# Altium PCB display.PcbDoc
Units mm, origin at the board's own origin, x right, y up, seen from the top; angles counter-clockwise.
Board outline 76 x 33 mm, 2 copper layers (Top Layer, Bottom Layer), stack 1.57 mm thick; 35 components, 31 nets, 127 pads, 53 vias.
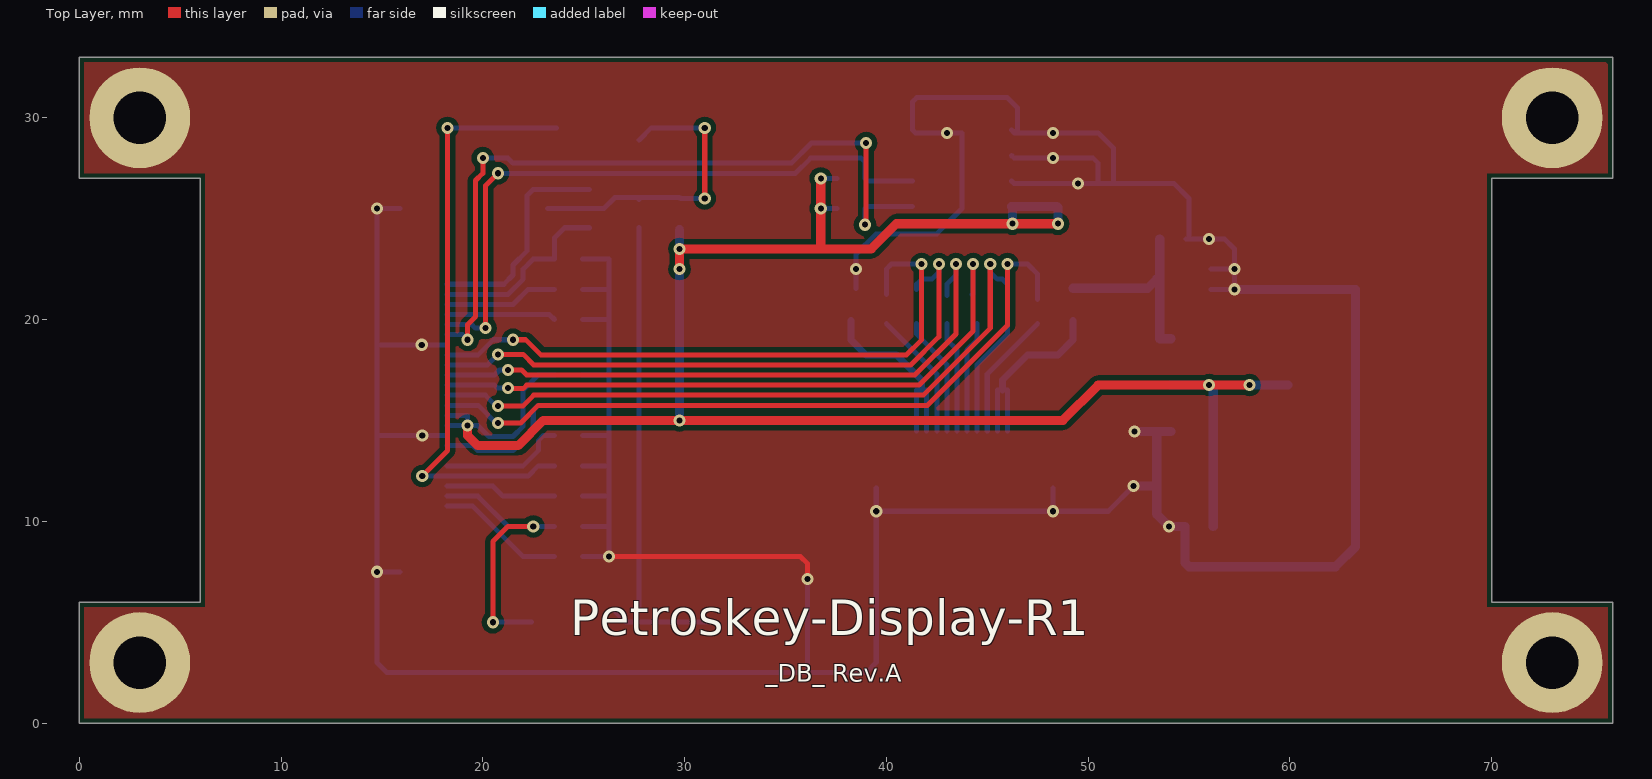
[diagram p0: Top Layer view]
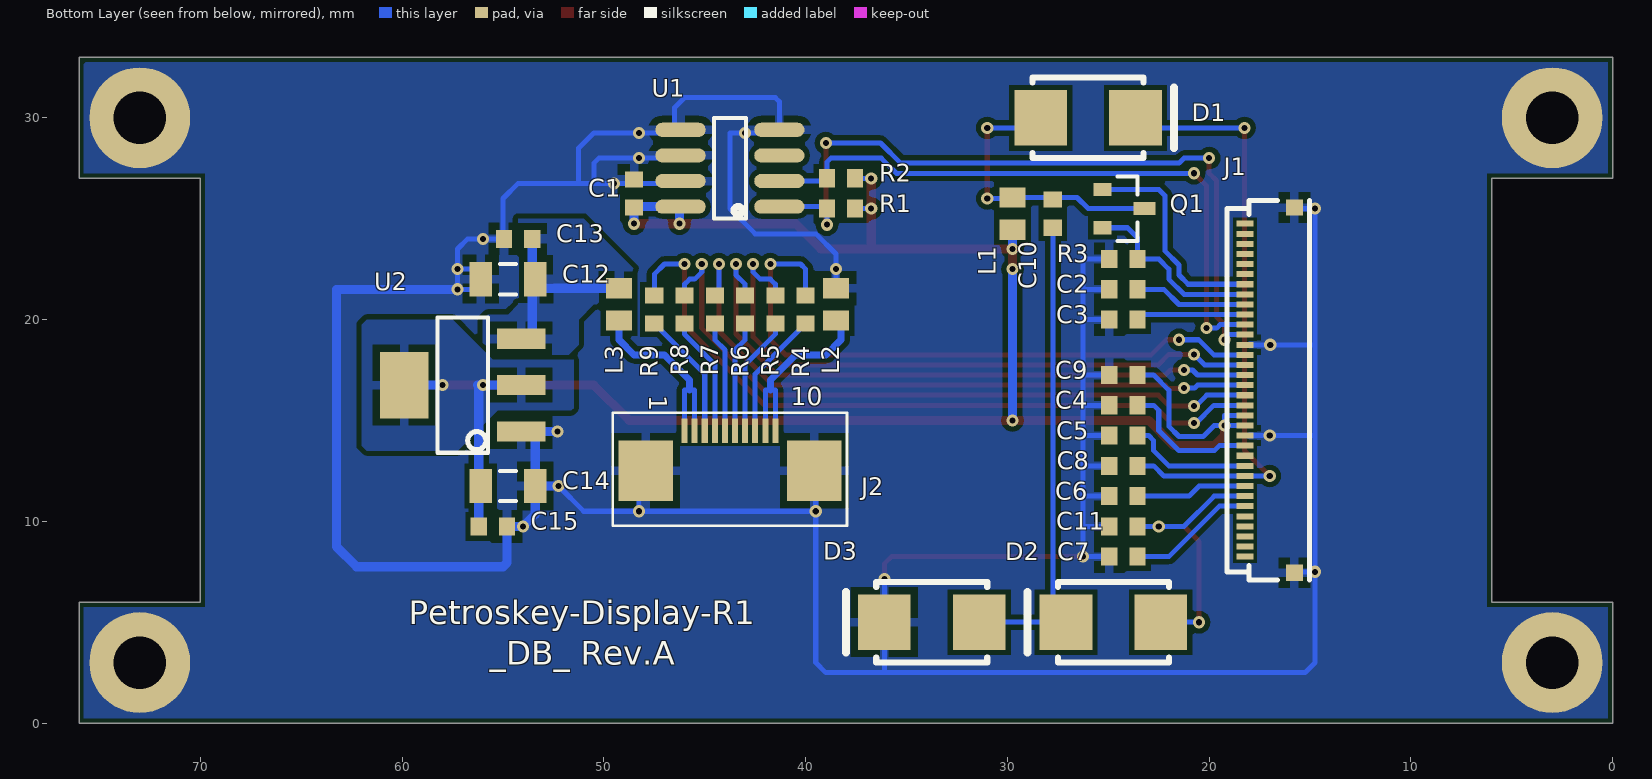
[diagram p1: Bottom Layer view, seen from below]
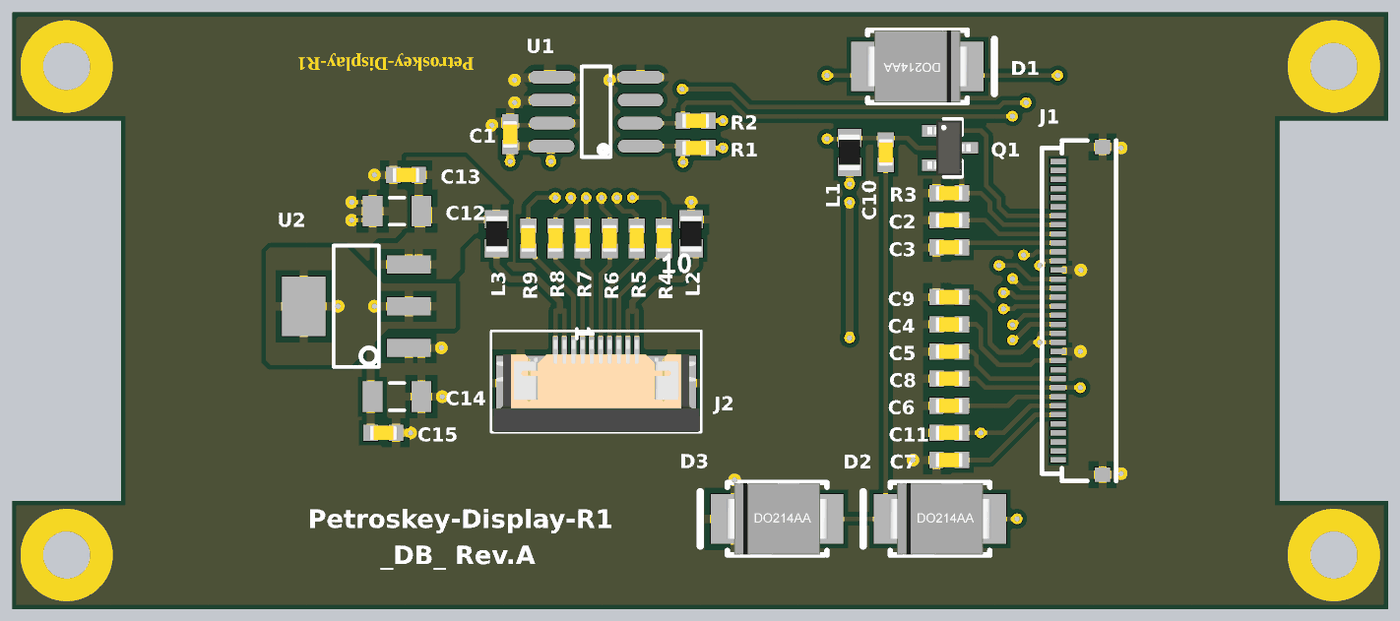
[diagram p2: 3D render of the assembled board from below, using the file's embedded part models]

## Layer stack, top to bottom
Top Solder: solder mask 0.0102, Solder Resist, Dk 3.5
Top Layer: signal copper 0.035
Dielectric1: core 1.5, FR-4, Dk 4.2
Bottom Layer: signal copper 0.035
Bottom Solder: solder mask 0.0102, Solder Resist, Dk 3.5

## Board outline
0,0 0,6 6,6 6,27 0,27 0,33 76,33 76,27 70,27 70,6 76,6 76,0

## Design rules (kind name [scope] priority, off if disabled: settings)
Clearance Clearance_comp [InComponent('J1','J2')] p1: gap=0.15
Clearance [All] p2: gap=0.25
ComponentClearance [All] p1: gap=0.25 collisioncheckmode=3 verticalgap=0.25 showdistances=FALSE
HoleSize [All] p1: absolutevalues=TRUE maxlimit=10 minlimit=0.2 maxpercent=80.000 minpercent=20.000
HoleToHoleClearance [All] p1: gap=0.25 allowstackedmicrovias=TRUE
MinimumSolderMaskSliver [All] p1: minsoldermaskwidth=0.1
PlaneClearance [All] p1: clearance=0.5
PlaneConnect PlaneConnect_via [isvia] p1: planeconnectstyle=Direct reliefexpansion=0.508 reliefentries=4 reliefconductorwidth=0.254 reliefairgap=0.254
PlaneConnect [All] p2: planeconnectstyle=Relief reliefexpansion=0.6 reliefentries=4 reliefconductorwidth=0.35 reliefairgap=0.35
PolygonConnect PolygonConnect_hole [(ObjectKind = 'Pad') And (Name = 'Free-Hole') And (AsMM(HoleDiameter) = 2.6)] p1: connectstyle=Direct reliefconductorwidth=0.254 reliefentries=4 polygonreliefangle="90 Angle" airgapwidth=0.254
PolygonConnect PolygonConnect_via [isvia] p2: connectstyle=Direct reliefconductorwidth=0.254 reliefentries=4 polygonreliefangle="90 Angle" airgapwidth=0.254
PolygonConnect [All] p3: connectstyle=Relief reliefconductorwidth=0.45 reliefentries=4 polygonreliefangle="90 Angle" airgapwidth=0.35
RoutingCorners [All] p1: cornerstyle=45-Degree minsetback=2.5 maxsetback=2.5
RoutingVias [All] p1: holewidth=0.3 width=0.6 viastyle="Through Hole" minholewidth=0.2 minwidth=0.35 maxholewidth=0.5 maxwidth=1
SilkToSilkClearance [All] p1: silktosilkclearance=0.1
SilkToSolderMaskClearance [IsPad] p1: minsilkscreentomaskgap=0.15 clearancetoexposedcopper=TRUE
SolderMaskExpansion SolderMaskExpansion_via [isVia] p1: expansion=-10
SolderMaskExpansion [All] p2: expansion=0.05
Width [All] p1: maxlimit=5 minlimit=0.15 preferedwidth=0.25
21 further rules are at their usual default settings.

## Components (designator, comment, footprint, x,y, rotation, side; value= is the part's Value field where it differs from the comment)
C1 "100nF" 0603_[1608] 48.5,26.25 r270 bottom
C2 "1uF" 0603_[1608] 24.25,21.5 r180 bottom
C3 "1uF" 0603_[1608] 24.25,20 r180 bottom
C4 "1uF" 0603_[1608] 24.25,15.75 r180 bottom
C5 "1uF" 0603_[1608] 24.25,14.25 r180 bottom
C6 "1uF" 0603_[1608] 24.25,11.25 r180 bottom
C7 "1uF" 0603_[1608] 24.25,8.25 r180 bottom
C8 "1uF" 0603_[1608] 24.25,12.75 r180 bottom
C9 "1uF" 0603_[1608] 24.25,17.25 r180 bottom
C10 "2.2uF" 0603_[1608] 27.75,25.25 r90 bottom
C11 "1uF" 0603_[1608] 24.25,9.75 r180 bottom
C12 "10uF" 1206_[3216] 54.75,22 r0 bottom
C13 "100nF" 0603_[1608] 54.25,24 r180 bottom
C14 "10uF" 1206_[3216] 54.75,11.75 r180 bottom
C15 "100nF" 0603_[1608] 55.5,9.75 r0 bottom
D1 "SS24" DO214AA_12 26,30 r0 bottom
D2 "SS24" DO214AA_12 24.75,5 r180 bottom
D3 "SS24" DO214AA_12 33.75,5 r180 bottom
J1 "FH12-40S-0_6.5SH" fcp_zif_34pin_0,5mm 17,16.5 r90 bottom locked
J2 "Display" fcc-zif_10pin_0.5mm 43.75,13.5 r180 bottom
L1 "47uH" 0805_[2012] 29.75,25.25 r90 bottom
L2 "220 ohm @ 100MHz" 0805_[2012] 38.5,20.75 r270 bottom
L3 "220 ohm @ 100MHz" 0805_[2012] 49.25,20.75 r270 bottom
Q1 "MMBF170-7-F" sot-23 24.25,25.5 r180 bottom
R1 "10k" 0603_[1608] 38.25,25.5 r0 bottom
R2 "10k" 0603_[1608] 38.25,27 r0 bottom
R3 "2k2" 0603_[1608] 24.25,23 r180 bottom
R4 "33R" 0603_[1608] 40,20.5 r90 bottom
R5 "33R" 0603_[1608] 41.5,20.5 r90 bottom
R6 "33R" 0603_[1608] 43,20.5 r90 bottom
R7 "33R" 0603_[1608] 44.5,20.5 r90 bottom
R8 "33R" 0603_[1608] 46,20.5 r90 bottom
R9 "33R" 0603_[1608] 47.5,20.5 r90 bottom
U1 "LM75A" SOIC8 43.75,27.5 r0 bottom
U2 "LM1117xxx-3.3" SOT-223 57,16.75 r0 bottom

## Footprints (in the part's own frame and the unit in brackets; to place one, negate y for a bottom-side part, rotate by r counter-clockwise, add the part's x,y. Pads: shape width x height; smd on the part's side, far side on the other; paste and mask are expansions set on the pad)
0603_[1608] [mm] "Chip Capacitor, Body 1.6x0.8mm, IPC High Density"
  rect 0.8x0.9 smd: 1(-0.7,0) 2(0.7,0)
  body extent -0.75,-0.4 0.75,0.4, height 0.67
0805_[2012] [mm] "Chip Resistor, Body 2.0x1.2mm, IPC High Density"
  rect 1x1.3 smd: 1(-0.8,0) 2(0.8,0)
  body extent -1,-0.6 1,0.6, height 0.62
1206_[3216] [mm] "Chip Capacitor, Body 3.2x1.6mm, IPC High Density"
  rect 1.1x1.7 smd: 1(-1.35,0) 2(1.35,0)
  silkscreen extent -0.4,-0.75 0.4,0.75, body extent -1.7,-0.9 1.7,0.9, height 1.3
DO214AA_12 [mil]
  rect 103x108 smd: 1(-92.5,0) 2(92.5,0)
  silkscreen extent -167,-79 108,79, body extent -110,-78 110,78, height 106
fcc-zif_10pin_0.5mm [mm] "10 pins"
  rect 0.3x1.2 smd: 1(-2.25,0.99) 2(-1.75,0.99) 3(-1.25,0.99) 4(-0.75,0.99) 5(-0.25,0.99) 6(0.25,0.99) 7(0.75,0.99) 8(1.25,0.99) 9(1.75,0.99) 10(2.25,0.99)
  rect 2.7x3 smd: Z1(-4.18,-0.99) Z2(4.18,-0.99)
  silkscreen extent -5.8,-3.71 5.8,1.89, body extent -5.7,-3.71 5.7,1.39, height 2.06
fcp_zif_34pin_0,5mm [mm]
  rect 0.3x0.85 smd: 1(8.25,1.225) 2(7.75,1.225) 3(7.25,1.225) 4(6.75,1.225) 5(6.25,1.225) 6(5.75,1.225) 7(5.25,1.225) 8(4.75,1.225) 9(4.25,1.225) 10(3.75,1.225) 11(3.25,1.225) 12(2.75,1.225) 13(2.25,1.225) 14(1.75,1.225) 15(1.25,1.225) 16(0.75,1.225) 17(0.25,1.225) 18(-0.25,1.225) 19(-0.75,1.225) 20(-1.25,1.225) 21(-1.75,1.225) 22(-2.25,1.225) 23(-2.75,1.225) 24(-3.25,1.225) 25(-3.75,1.225) 26(-4.25,1.225) 27(-4.75,1.225) 28(-5.25,1.225) 29(-5.75,1.225) 30(-6.25,1.225) 31(-6.75,1.225) 32(-7.25,1.225) 33(-7.75,1.225) 34(-8.25,1.225)
  rect 0.8x0.85 smd: Z1(-9.05,-1.225) Z2(9.05,-1.225)
  silkscreen extent -9.4,-1.97 9.4,2.13
SOIC8 [mm] "SOIC, 8-Leads, Body 4.9x3.8mm, Pitch 1.27mm, IPC Low Density"
  oval 2.5x0.7 smd: 1(-2.45,1.905) 2(-2.45,0.635) 3(-2.45,-0.635) 4(-2.45,-1.905) 5(2.45,-1.905) 6(2.45,-0.635) 7(2.45,0.635) 8(2.45,1.905)
  silkscreen extent -0.8,-2.5 0.8,2.5, body extent -2,-2.5 2,2.5, height 1.75
sot-23 [mm] "SOT23, 3-Leads, Body 2.9x1.3mm, Pitch 0.95mm, Lead Span 2.5mm, IPC High Density"
  rect 0.9x0.65 smd: 1(-1.038,0.95) 2(-1.038,-0.95)
  rect 1.1x0.65 smd: 3(1.038,0)
  silkscreen extent -0.3,-1.6 0.7,1.6, body extent -1.2,-1.52 1.2,1.52, height 1.22
SOT-223 [mm] "SOT223, 4-Leads, Body 6.5x3.5mm, Pitch 2.3mm, Lead Span 7mm, IPC Medium Density"
  rect 2.4x1 smd: 1(-2.9,2.3) 2(-2.9,0) 3(-2.9,-2.3)
  rect 2.4x3.3 smd: 4(2.9,0)
  silkscreen extent -1.25,-3.35 1.25,3.35, body extent -1.85,-3.35 1.85,3.35, height 1.8

## Part data
C1 C13 C15: library part Cap, "Ceramic X7R 50V"
C2 C3 C4 C5 C6 C7 C8 C9 C10 C11: library part Cap, "Ceraminc 25V"
C12 C14: library part "Cap Pol1", "Ceramic X5R 25V"
D1 D2 D3: library part Diode, "Schottky diode Vf as lower as possible, 0.2 to 0.4V and the repetitive peak reverse voltage > 25V."
J1: "FH34SRJ-34S-0.5SH(50)"
J2: library part "Header 10", "Header, 10-Pin"
L1: library part Inductor, "0.8A"
L2 L3: library part Inductor, "WE 742792022"
Q1: library part "MOSFET-N 3pin", "VDSS=30V, VGS-th<2.5V@250uA."
R1 R2 R3 R4 R5 R6 R7 R8 R9: library part Res1, "Resistor"
U1: library part LM75, "Temperature sensor"
U2: library part LM1117-FIXED-OUT, "LM1117 LDO Fixed output"

## Free pads (board coordinates)
  round 5 hole 2.6: Hole(3,3) Hole(3,30) Hole(73,3) Hole(73,30)

## Via types
v1: diameter 0.6, hole 0.3, Top Layer to Bottom Layer, 53 vias

## Nets (pads, with @x,y where several pads share a name; then routed paths per layer and width w, separated by ;. In a path a pad name is that pad's centre, name@x,y a point inside that pad or via, vN(x,y) a via of type N, cw(c..) or ccw(c..) an arc to the next point about the centre after c; other vN are vias at no path point)
+3.3V: C1.2 C9.2 C14.1 C15.2 J1.20 J1.21 L1.1 R1.1 R2.1 U1.8 U2.2 U2.4 | length 99
  Top Layer w0.45: v1(19.25,14.75) 19.25,14.25 19.75,13.75 21.75,13.75 23,15 48.75,15 50.5,16.75 v1(56,16.75) v1(58,16.75) ; v1(29.75,22.5) v1(29.75,23.5) 36.75,23.5 ; v1(36.75,27) v1(36.75,25.5) 36.75,23.5 ; v1(48.5,24.75) v1(46.25,24.75) 40.5,24.75 39.25,23.5 36.75,23.5
  Bottom Layer w0.25: J1.21 v1(19.25,14.75) ; J1.20 19.25,15.25 v1(19.25,14.75) ; C9.2 22.75,17.25 22,16.5 22,14.707 21.493,14.2 20.3,14.2 19.75,14.75 v1(19.25,14.75) ; v1(36.75,25.5) R1.1 ; v1(36.75,27) R2.1
  Bottom Layer w0.45: v1(29.75,15) v1(29.75,22.5) ; v1(29.75,23.5) L1.1 ; U1.8 U1.8@46.205,25.595 ; v1(46.25,24.75) 46.25,25.55 U1.8@46.205,25.595 ; v1(48.5,24.75) C1.2 48.455,25.595 U1.8@46.205,25.595 ; U2.2 v1(56,16.75) 56.25,16.75 56.2,16.7 C15.2 ; v1(58,16.75) U2.4
+5V: C12.1 C13.2 L3.1 U2.3 | length 9.8
  Bottom Layer w0.45: L3.1 52.95,21.55 C12.1 ; C13.2 53.55,19.05 U2.3
BUSY: J1.14 R4.2 | length 31.3
  Top Layer w0.25: v1(21.5,19) 22.125,19 22.875,18.25 41,18.25 41.75,19 v1(41.75,22.75)
  Bottom Layer w0.25: J1.14 19.77,18.25 20.52,19 v1(21.5,19) ; R4.2@40,21.25 40,22.5 40.25,22.75 v1(41.75,22.75)
C\S\: J1.17 R7.2 | length 32.2
  Top Layer w0.25: v1(21.25,16.6) 21.275,16.575 22,16.575 22.175,16.75 41.621,16.75 44.3,19.429 v1(44.3,22.75)
  Bottom Layer w0.25: J1.17 20.575,16.75 20.725,16.6 v1(21.25,16.6) ; R7.2@44.25,21.25 44.3,21.3 v1(44.3,22.75)
D0: J1.18 R8.2 | length 33.9
  Top Layer w0.25: v1(20.75,15.725) 22,15.725 22.525,16.25 41.828,16.25 45.15,19.572 v1(45.15,22.75)
  Bottom Layer w0.25: J1.18 20.12,16.25 20.645,15.725 v1(20.75,15.725) ; v1(45.15,22.75) 45.15,22.35 45.5,22 45.75,22 46,21.75 R8.2@46,21.25
D1: J1.19 R9.2 | length 36.1
  Top Layer w0.25: v1(20.75,14.875) 21.875,14.875 22.75,15.75 42.036,15.75 46,19.714 v1(46,22.75)
  Bottom Layer w0.25: J1.19 19.77,15.75 20.645,14.875 v1(20.75,14.875) ; v1(46,22.75) 47,22.75 47.5,22.25 R9.2@47.5,21
D/C\: J1.16 R6.2 | length 31.5
  Top Layer w0.25: v1(21.25,17.5) 21.925,17.5 22.175,17.25 41.414,17.25 43.45,19.286 v1(43.45,22.75)
  Bottom Layer w0.25: J1.16 20.575,17.25 20.825,17.5 v1(21.25,17.5) ; R6.2 43,21.75 43.45,22.2 v1(43.45,22.75)
GND: C1.1 C2.1 C3.1 C4.1 C5.1 C6.1 C7.1 C8.1 C9.1 C11.1 C12.2 C13.1 C14.2 C15.1 D3.1 J1.13 J1.22 J1.Z1 J1.Z2 J2.Z1 J2.Z2 L2.1 pad.Hole R3.1 U1.4 U1.5 U1.6 U1.7 U2.1 | length 214.4
  Top Layer w0.25: v1(26.25,8.25) 35.75,8.25 36.099,7.9 v1(36.099,7.151)
  Bottom Layer w0.25: J1.Z1@15.9,7.5 v1(14.75,7.5) ; J1.Z2@15.9,25.5 v1(14.75,25.5) 14.75,18.75 ; J1.13 v1(16.975,18.75) 14.75,18.75 ; J1.22@18.25,14.25 v1(17,14.25) 14.75,14.25 ; C7.1 v1(26.25,8.25) 26.25,9.75 ; C11.1 26.25,9.75 ; C6.1 26.25,11.25 ; C8.1 26.25,12.75 ; C5.1 26.25,14.25 ; C4.1 26.25,15.75 ; C9.1 26.25,17.25 ; C3.1 26.25,20 ; C2.1 26.25,21.5 ; R3.1 26.25,23 26.25,21.5 ; 36.099,2.651 D3.1 v1(36.099,7.151) ; L2.1 v1(38.5,22.5) 38.5,23.25 39.5,24.25 42.5,24.25 43.75,25.5 43.75,29.25 v1(43,29.25) 41.455,29.25 U1.4 41.3,30.8 41.5,31 46,31 46.5,30.5 46.5,29.395 U1.5@46.355,29.25 ; J2.Z2@39.5,11.65 v1(39.5,10.5) ; U1.7 46.315,26.75 v1(49.5,26.75) 50.5,26.75 ; U1.6 46.335,28 v1(48.25,28) 50.25,28 50.5,27.75 50.5,26.75 ; U1.5 U1.5@46.355,29.25 ; J2.Z1@48.25,11.65 v1(48.25,10.5) ; v1(52.25,11.75) 51,10.5 v1(48.25,10.5) ; C13.1@54.85,24 v1(56,24) 56.75,24 57.25,23.5 v1(57.25,22.5) ; C13.1 55,24.05 55,26 54.25,26.75 51.25,26.75 ; C12.2@56.1,21.5 v1(57.25,21.5) v1(57.25,22.5) ; C12.2@56.1,22.5 v1(57.25,22.5) ; v1(14.75,7.5) 14.75,14.25 ; v1(14.75,7.5) 14.75,3 15.25,2.5 39,2.5 39.5,3 v1(39.5,10.5) ; 14.75,14.25 14.75,18.75 ; 26.25,9.75 26.25,11.25 ; 26.25,11.25 26.25,12.75 ; 26.25,12.75 26.25,14.25 ; 26.25,14.25 26.25,15.75 ; 26.25,15.75 26.25,17.25 ; 26.25,17.25 26.25,20 ; 26.25,20 26.25,21.5 ; v1(39.5,10.5) v1(48.25,10.5) ; U1.5@46.355,29.25 v1(48.25,29.25) 50.5,29.25 51.25,28.5 51.25,26.75 ; 50.5,26.75 51.25,26.75
  Bottom Layer w0.45: v1(52.25,11.75) C14.2 ; v1@52.25,14.5 v1(52.3,14.45) U2.1@53.45,14.45 ; U2.1 U2.1@53.45,14.45 ; v1(57.25,21.5) 63.25,21.5 63.25,8.75 62.25,7.75 55,7.75 54.8,7.95 C15.1 v1(54,9.75) 53.4,10.35 C14.2 ; C14.2 53.4,14.4 U2.1@53.45,14.45
I2C_SCL: J1.11 R2.2 U1.2 | length 31.5
  Top Layer w0.25: v1(20.141,19.575) 20.141,26.641 v1(20.75,27.25)
  Bottom Layer w0.25: J1.11 19.455,19.75 19.63,19.575 v1(20.141,19.575) ; v1(20.75,27.25) 35.5,27.25 36.25,28 38.75,28 38.95,27.8 R2.2 ; R2.2@39.085,26.865 U1.2
I2C_SDA: J1.12 R1.2 U1.1 | length 37.2
  Top Layer w0.25: v1(19.25,19) 19.25,19.75 19.641,20.141 19.641,26.891 20,27.25 v1(20,28) ; v1(38.95,24.7) 39,24.75 v1(39,28.75)
  Bottom Layer w0.25: J1.12 19,19.25 v1(19.25,19) ; v1(20,28) 21.25,28 21.5,27.75 35.293,27.75 36.293,28.75 v1(39,28.75) ; v1(38.95,24.7) R1.2 39.045,25.595 U1.1
NetC2_2: C2.2 J1.9 | length 5.6
  Bottom Layer w0.25: J1.9 21.5,20.75 22.25,21.5 C2.2
NetC3_2: C3.2 J1.10 | length 5.4
  Bottom Layer w0.25: J1.10 23.3,20.25 C3.2
NetC4_2: C4.2 J1.23 | length 6.9
  Bottom Layer w0.25: J1.23 19.5,13.75 19.75,13.5 21.5,13.5 22.5,14.5 22.5,15.5 22.75,15.75 C4.2
NetC5_2: C5.2 J1.25 | length 6.2
  Bottom Layer w0.25: J1.25 22,12.75 22.75,13.5 22.75,14 23,14.25 C5.2
NetC6_2: C6.2 J1.27 | length 5.5
  Bottom Layer w0.25: J1.27 20.5,11.75 21,11.25 C6.2
NetC7_2: C7.2 J1.29 | length 6.4
  Bottom Layer w0.25: J1.29 19.5,10.75 22,8.25 C7.2
NetC8_2: C8.2 D1.1 J1.26 | length 29.9
  Top Layer w0.25: v1(17,12.25) 18.25,13.5 v1(18.25,29.5)
  Bottom Layer w0.25: v1(17,12.25) J1.26 20,12.25 22.25,12.25 22.75,12.75 C8.2 ; v1(18.25,29.5) D1.1@23.65,29.5
NetC10_1: C10.1 D2.1 D3.2 | length 24.1
  Bottom Layer w0.25: D2.1@26.5,5.599 D2.1 D3.2 ; D2.1@27.75,5.599 C10.1
NetC10_2: C10.2 D1.2 L1.2 Q1.3 | length 14.9
  Top Layer w0.25: v1(31,26) v1@31,29.25
  Bottom Layer w0.25: Q1.3 26,25.5 26.55,26.05 C10.2@27.75,26.05 ; C10.2 C10.2@27.75,26.05 ; D1.2@27.75,28.901 28.349,29.5 v1(31,29.5) ; v1(31,26) 29.8,26 L1.2 C10.2@27.75,26.05
NetC11_2: C11.2 D2.2 J1.28 | length 14.2
  Top Layer w0.25: v1(20.5,5) 20.5,9 21.25,9.75 v1(22.5,9.75)
  Bottom Layer w0.25: J1.28 19.75,11.25 21.25,9.75 C11.2 ; v1(20.5,5) D2.2
NetJ1_7: J1.7 Q1.1 | length 10.9
  Bottom Layer w0.25: J1.7 21.043,21.75 21.5,22.207 21.5,22.707 22.2,23.407 22.2,26.15 22.5,26.45 Q1.1
NetJ1_8: J1.8 Q1.2 R3.2 | length 9.3
  Bottom Layer w0.25: J1.8 21.25,21.25 22,22 22,22.5 22.5,23 R3.2 23.55,24.05 24.05,24.55 Q1.2
NetJ2_1: J2.1 J2.2 L3.2 | length 10.3
  Bottom Layer w0.25: J2.2 45.5,16.5 45.75,16.5 46,16.5 J2.1
  Bottom Layer w0.35: 45.75,16.5 45.75,17 47,18.25 48.5,18.25 49.25,19 L3.2
NetJ2_3: J2.3 R9.1 | length 6.3
  Bottom Layer w0.25: J2.3 45,17.3 R9.1
NetJ2_4: J2.4 R8.1 | length 5.9
  Bottom Layer w0.25: J2.4 44.5,17.775 46,19.275 R8.1
NetJ2_5: J2.5 R7.1 | length 5.5
  Bottom Layer w0.25: J2.5 44,18.5 44.5,19 R7.1
NetJ2_6: J2.6 R6.1 | length 5.5
  Bottom Layer w0.25: R6.1 43,19 43.5,18.5 J2.6
NetJ2_7: J2.7 R5.1 | length 5.9
  Bottom Layer w0.25: R5.1 41.5,19.275 43,17.775 J2.7
NetJ2_8: J2.8 R4.1 | length 6.3
  Bottom Layer w0.25: R4.1 42.5,17.3 J2.8
NetJ2_9: J2.9 J2.10 L2.2 | length 10.3
  Bottom Layer w0.25: J2.10 41.5,16.5 41.75,16.5 42,16.5 J2.9
  Bottom Layer w0.35: L2.2@38.25,19.95 38.25,19 39,18.25 40.5,18.25 41.75,17 41.75,16.5
R\E\S\: J1.15 R5.2 | length 31
  Top Layer w0.25: v1(20.75,18.275) 22,18.275 22.525,17.75 41.207,17.75 42.6,19.143 v1(42.6,22.75)
  Bottom Layer w0.25: J1.15 20.225,17.75 v1(20.75,18.275) ; R5.2@41.5,21.5 41.5,21.75 41.75,22 42.25,22 42.6,22.35 v1(42.6,22.75)
pads on no net: J1.1 J1.2 J1.3 J1.4 J1.5 J1.6 J1.24 J1.30 J1.31 J1.32 J1.33 J1.34 U1.3

## Polygon pours and split planes (outlines as drawn)
+3.3V on Bottom Layer "NONET_L01_P-001" (solid, remove dead copper, pour order 8): 51.5,18 55.5,18 56.25,18.75 57.5,20 61,20 61.75,20 62,19.75 62,15 62,13.75 61.75,13.5 57.25,13.5 55.5,15.25 55.25,15.5 51.5,15.5
+5V on Bottom Layer "NONET_L01_P-001" (solid, pour order 9): 48.25,20.75 50.5,20.75 51,20.25 51.25,20 51.25,19 51.25,18.75 51.5,18.5 51.75,18.25 55.5,18.25 56,18.75 56,19 56,20 55.75,20.25 54.75,20.25 54.25,20.75 54.25,25 51,25 48.25,22.25
GND on Bottom Layer "NONET_L01_P-001" (solid, remove dead copper, pour order 12): 0.25,5.75 6.25,5.75 6.25,27.25 0.25,27.25 0.25,32.75 70.75,32.75 70.75,27.25 64.75,27.25 64.75,5.75 70.75,5.75 70.75,0.25 0.25,0.25
GND on Bottom Layer "Bottom Layer-GND" (solid, remove dead copper, pour order 11): 0.25,5.75 6.25,5.75 6.25,27.25 0.25,27.25 0.25,32.75 75.775,32.75 75.775,27.25 69.75,27.25 69.75,5.75 75.775,5.75 75.775,0.25 0.25,0.25
GND on Top Layer "Top Layer-GND" (solid, remove dead copper, pour order 10): 0.25,5.75 6.25,5.75 6.25,27.25 0.25,27.25 0.25,32.75 75.75,32.75 75.75,27.25 69.75,27.25 69.75,5.75 75.75,5.75 75.75,0.25 0.25,0.25

## Silkscreen, mask and mechanical layers (free items; w line width, h text height)
Top Overlay:
  text "Petroskey-Display-R1" at 24.322,3.75 h3
  text "_DB_ Rev.A" at 34.027,1.75 h1.5
Bottom Overlay:
  text "Petroskey-Display-R1" at 59.678,4.5 h2
  text "_DB_ Rev.A" at 55.663,2.5 h2
Top Solder:
  text ".:DB:. Rev.A" at 63.25,13 h1.5 r90
  text "Petroskey-Display-R1" at 61.25,10.204 h1.5 r90
Bottom Solder:
  text ".:DB:. Rev.A" at 53.296,32.25 h1.5 r180
  text "Petroskey-Display-R1" at 50.5,30.5 h1.5 r180
Outline:
  lines w0.2: 0,0 0,6 6,6 6,27 0,27 0,33 6,33 76,33 76,27 70,27 70,6 76,6 76,0 6,0 0,0
Drawing:
  lines w0.15: 0,16.5 35.5,16.5
  lines w0.2: 6,6 18,6 18,27 6,27
  text "Mechanical Characteristics" at 169,-44.127 h5
Assembly_top:
  text "Assembly TOP" at 169,-44 h5
Assembly_bot:
  text "Assembly Bottom" at 17,-44.2 h5
Note_top:
  text "Note TOP" at 169,-44 h5
Note_bot:
  text "Note Bottom" at 17,-44.205 h5
TitleBlock_top:
  lines w0.3: 168.5,-57 168.5,-45 ; 168.5,-54 236,-54 ; 168.5,-51 236,-51 ; 168.5,-48 236,-48 ; 184.5,-57 184.5,-45 ; 226,-57 226,-54 ; 236,-45 184.5,-45 ; 236,-40 168.5,-40 168.5,-45 ; 168.5,-45 184.5,-45
  lines w0.35: -54,-62 -54,148 241,148 241,-62 -54,-62 ; -49,-57 -49,143 236,143 236,-57 -49,-57
  text "Board Name" at 169.5,-47.5 h3
  text "Peproskey Display" at 185.5,-47.5 h3
  text "Author" at 169.5,-50.5 h3
  text "Daniele Basile <asterix@develer.com>" at 185.5,-50.5 h3
  text "Date" at 169.5,-53.5 h3
  text ".print_date" at 185.5,-53.5 h3
  text "Revision" at 169.5,-56.5 h3
  text "A" at 185.5,-56.5 h3
  text "A3" at 228,-56.5 h3
TitleBlock_bot:
  lines w0.3: -49,-54 18.5,-54 ; -49,-51 18.5,-51 ; -49,-48 18.5,-48 ; -49,-45 2.5,-45 ; -49,-40 18.5,-40 18.5,-45 ; -39,-57 -39,-54 ; 2.5,-57 2.5,-45 ; 18.5,-57 18.5,-45 ; 2.5,-45 18.5,-45
  lines w0.35: -54,-62 -54,148 241,148 241,-62 -54,-62 ; -49,-57 -49,143 236,143 236,-57 -49,-57
  text "Peproskey Display" at 1.5,-47.5 h3
  text "Board Name" at 17.5,-47.5 h3
  text "Daniele Basile <asterix@develer.com>" at 1.5,-50.5 h3
  text "Author" at 17.5,-50.5 h3
  text ".print_date" at 1.5,-53.5 h3
  text "Date" at 17.5,-53.5 h3
  text "A3" at -41,-56.5 h3
  text "A" at 1.5,-56.5 h3
  text "Revision" at 17.5,-56.5 h3

## Text inside footprints (layer, text, board x,y; h text height)
D1: Note_bot "K" at 21.85,30.3 h1 r180
D2: Note_bot "K" at 28.9,4.7 h1
D3: Note_bot "K" at 37.9,4.7 h1
J2: Bottom Overlay "10" at 40.75,15.75 h0.9; Bottom Overlay "1" at 47.75,16.25 h0.9 r90
U2: Note_bot "1" at 53,15.25 h1 r180